# Altium PCB Copy of eos26_motherboard_basic.PcbDoc
Units mil, origin at the board's own origin, x right, y up, seen from the top; angles counter-clockwise.
Board outline 8000 x 6000 mil, 4 copper layers (Top Layer, MidLayer 1, MidLayer 2, Bottom Layer), stack 23.756 mil thick; 131 components, 110 nets, 656 pads, 6 vias.
Unrouted connection lines stored in the file: 269.
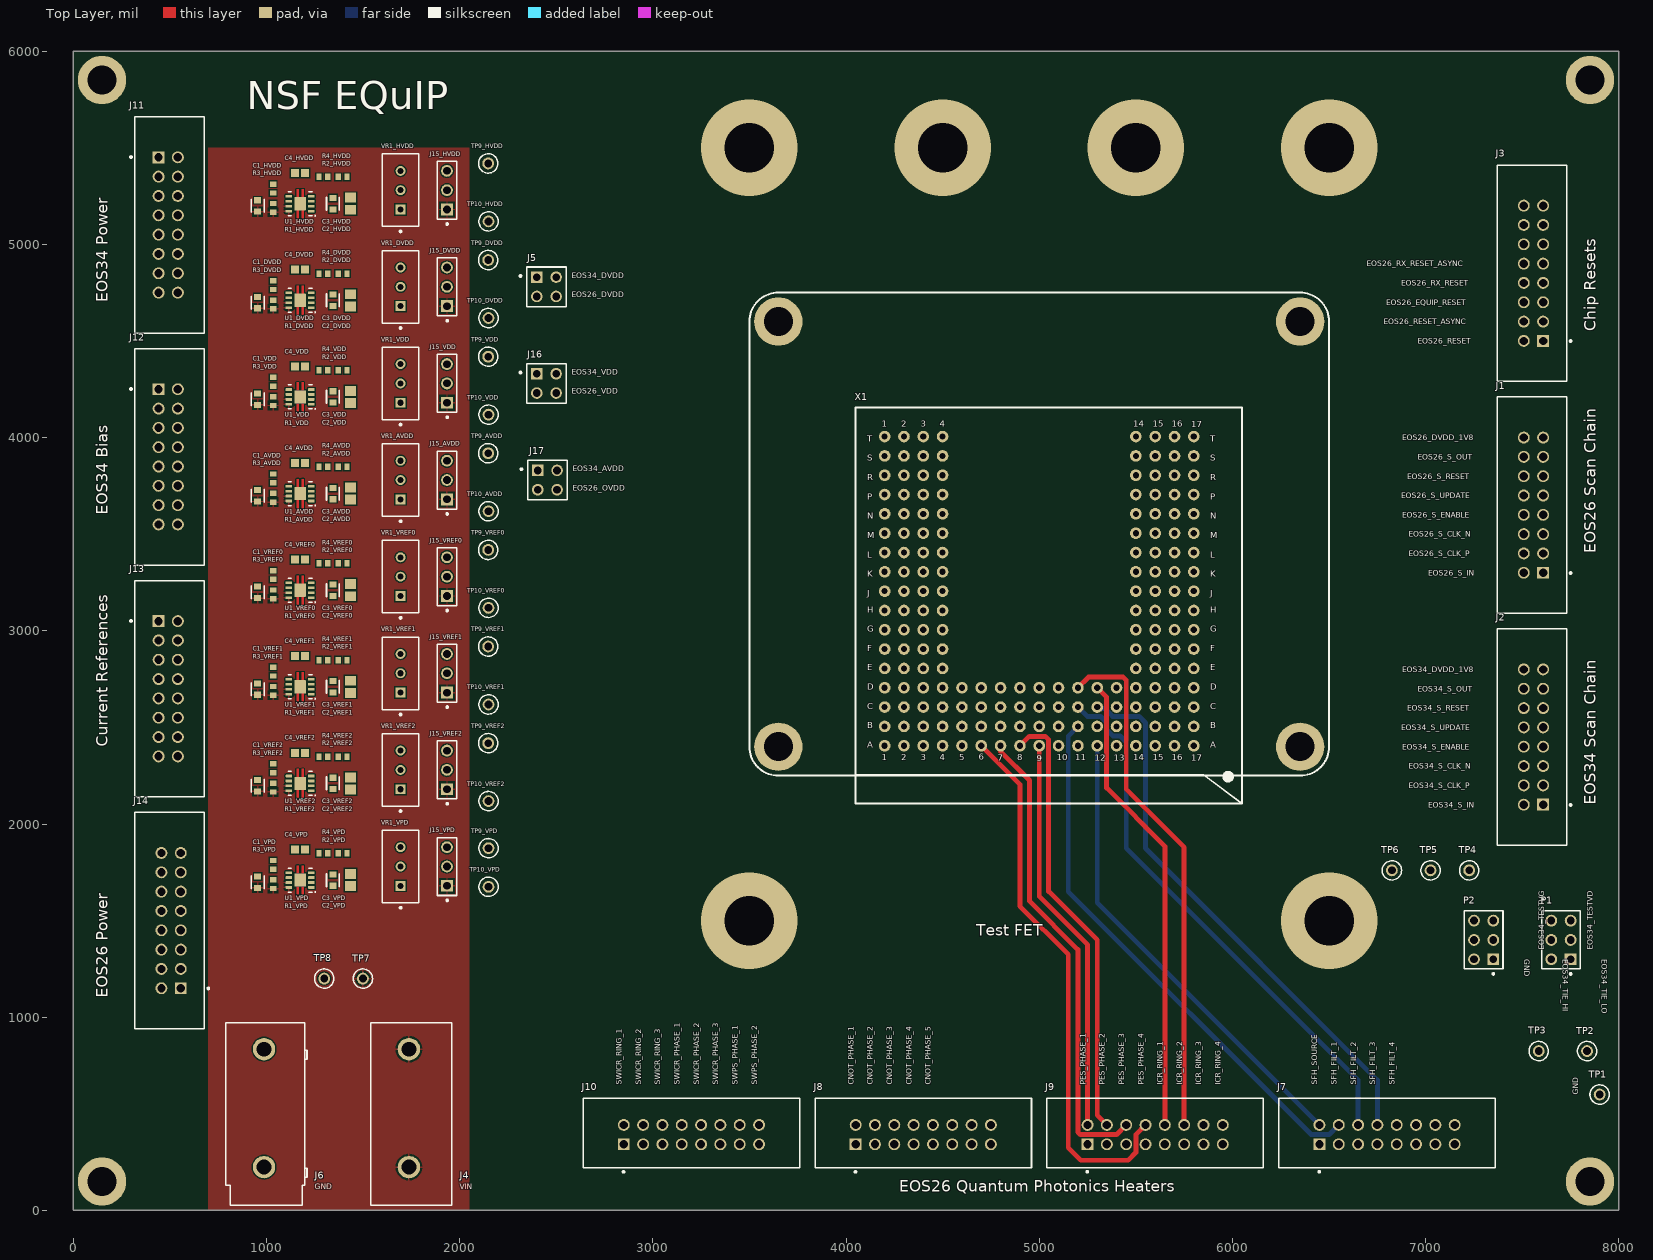
[diagram p0: Top Layer view]
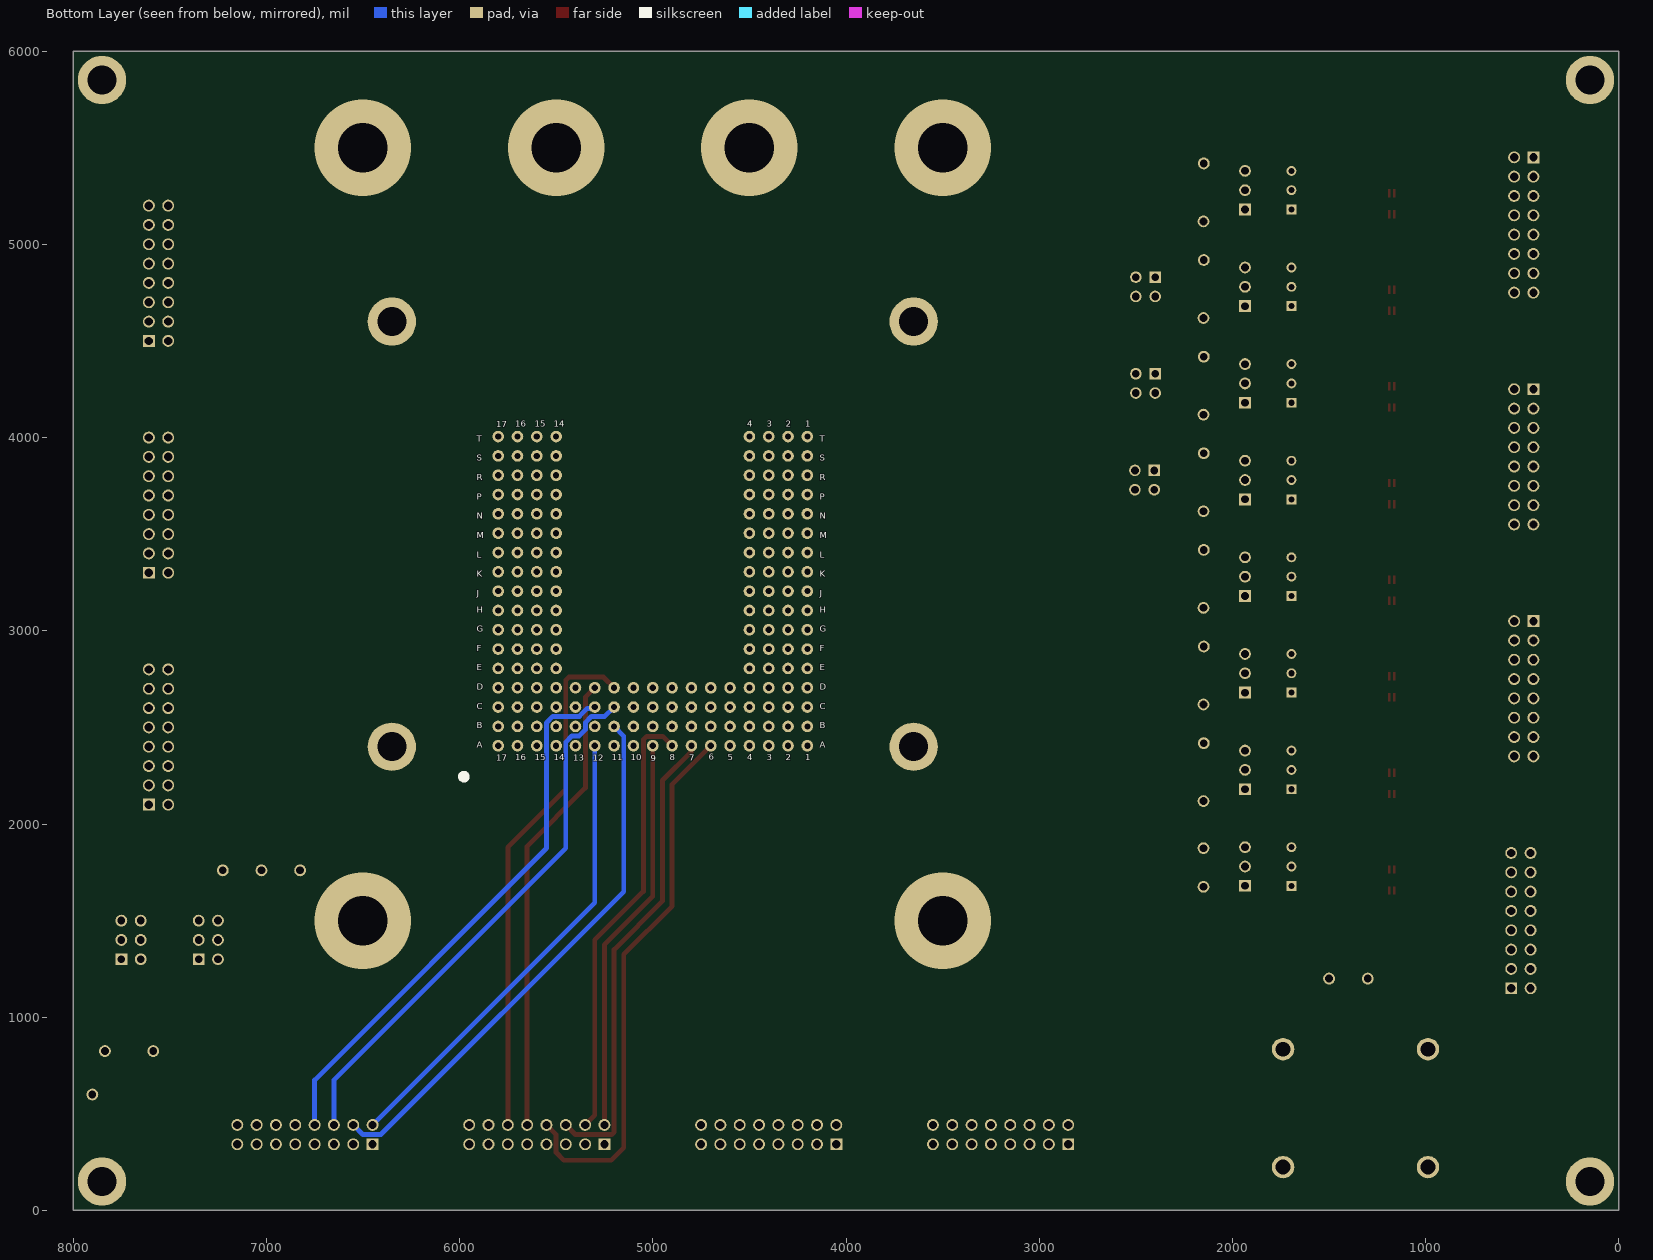
[diagram p1: Bottom Layer view, seen from below]
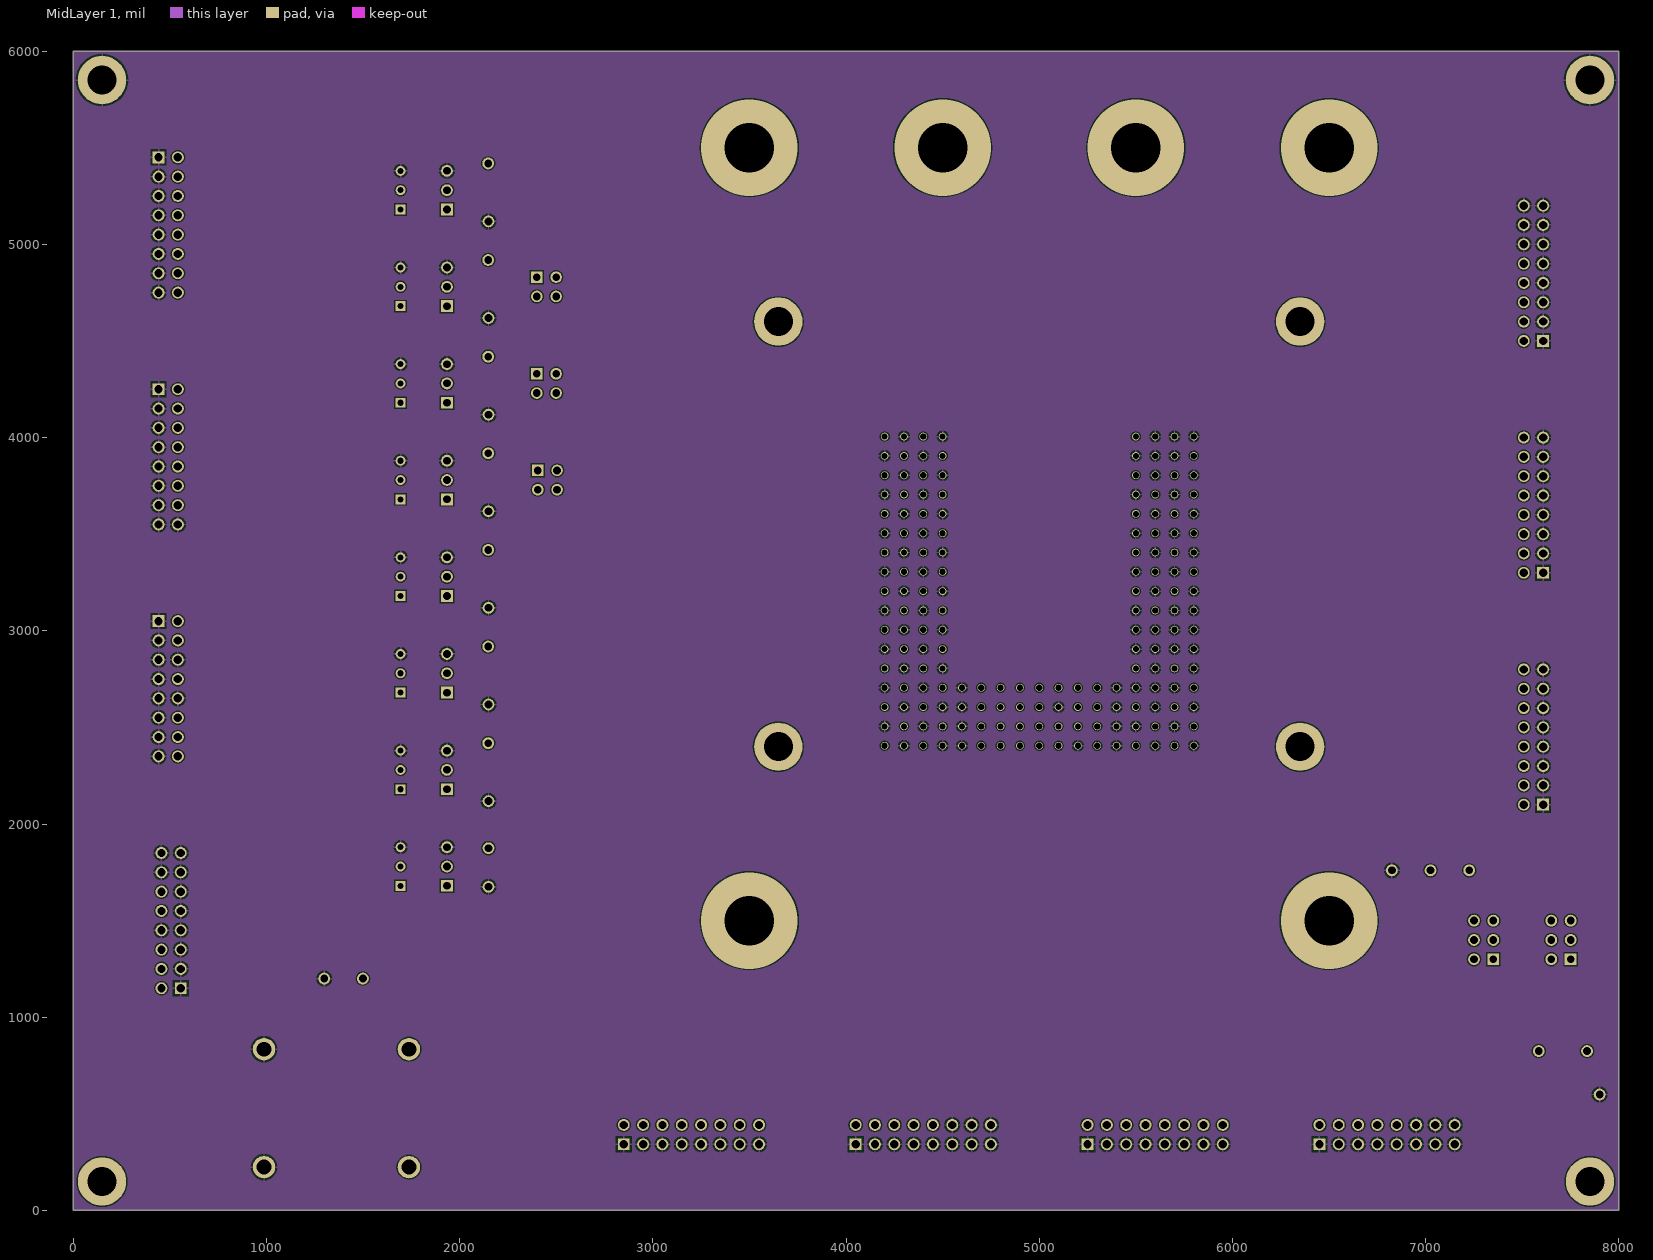
[diagram p2: MidLayer 1]

## Layer stack, top to bottom
Top Solder: solder mask 0.4, Solder Resist, Dk 3.5
Top Layer: signal copper 1.4
Dielectric 2: prepreg 2.8, PP-006, Dk 4.1
MidLayer 1: signal copper 1.3779
Dielectric 1: dielectric 12.6, FR-4, Dk 4.8
MidLayer 2: signal copper 1.3779
Dielectric 3: prepreg 2.8, PP-006, Dk 4.1
Bottom Layer: signal copper 1.4
Bottom Solder: solder mask 0.4, Solder Resist, Dk 3.5

## Board outline
0,0 0,6000 8000,6000 8000,0

## Design rules (kind name [scope] priority, off if disabled: settings)
Clearance [All] p1: gap=6 ignorepadtopadclearanceinfootprint=FALSE
PolygonConnect [All] p1: connectstyle=Relief reliefconductorwidth=10 reliefentries=4 polygonreliefangle="90 Angle" airgapwidth=10
RoomDefinition HVDD [InComponentClass('HVDD')] p1: confinementstyle=ConfineIn formatcopy=TRUE lockcomponents=FALSE outline 900,5050 2248.43,5050 2248.43,5518.5 900,5518.5
RoomDefinition DVDD [InComponentClass('DVDD')] p2: confinementstyle=ConfineIn formatcopy=TRUE lockcomponents=FALSE outline 900,4550 2248.43,4550 2248.43,5018.5 900,5018.5
RoomDefinition VREF2 [InComponentClass('VREF2')] p3: confinementstyle=ConfineIn formatcopy=TRUE lockcomponents=FALSE outline 900,2050 2248.43,2050 2248.43,2518.5 900,2518.5
RoomDefinition VREF1 [InComponentClass('VREF1')] p4: confinementstyle=ConfineIn formatcopy=TRUE lockcomponents=FALSE outline 900,2550 2248.43,2550 2248.43,3018.5 900,3018.5
RoomDefinition VREF0 [InComponentClass('VREF0')] p5: confinementstyle=ConfineIn formatcopy=TRUE lockcomponents=FALSE outline 900,3050 2248.43,3050 2248.43,3518.5 900,3518.5
RoomDefinition VPD [InComponentClass('VPD')] p6: confinementstyle=ConfineIn formatcopy=TRUE lockcomponents=FALSE outline 900,1550 2248.43,1550 2248.43,2025 900,2025
RoomDefinition VDD [InComponentClass('VDD')] p7: confinementstyle=ConfineIn formatcopy=TRUE lockcomponents=FALSE outline 900,4050 2248.43,4050 2248.43,4518.5 900,4518.5
RoomDefinition AVDD [InComponentClass('AVDD')] p8: confinementstyle=ConfineIn formatcopy=TRUE lockcomponents=FALSE outline 900,3550 2248.43,3550 2248.43,4018.5 900,4018.5
RoutingVias [All] p1: holewidth=28 width=50 viastyle="Through Hole" minholewidth=28 minwidth=50 maxholewidth=28 maxwidth=50
SolderMaskExpansion [All] p1: expansion=4
Width [All] p1: maxlimit=100 minlimit=8 preferedwidth=32
30 further rules are at their usual default settings.

## Classes and differential pairs
component class HVDD: C1_HVDD C2_HVDD C3_HVDD C4_HVDD J15_HVDD R1_HVDD R2_HVDD R3_HVDD R4_HVDD TP9_HVDD TP10_HVDD U1_HVDD VR1_HVDD
component class VREF2: C1_VREF2 C2_VREF2 C3_VREF2 C4_VREF2 J15_VREF2 R1_VREF2 R2_VREF2 R3_VREF2 R4_VREF2 TP9_VREF2 TP10_VREF2 U1_VREF2 VR1_VREF2
component class VREF1: C1_VREF1 C2_VREF1 C3_VREF1 C4_VREF1 J15_VREF1 R1_VREF1 R2_VREF1 R3_VREF1 R4_VREF1 TP9_VREF1 TP10_VREF1 U1_VREF1 VR1_VREF1
component class VREF0: C1_VREF0 C2_VREF0 C3_VREF0 C4_VREF0 J15_VREF0 R1_VREF0 R2_VREF0 R3_VREF0 R4_VREF0 TP9_VREF0 TP10_VREF0 U1_VREF0 VR1_VREF0
component class VPD: C1_VPD C2_VPD C3_VPD C4_VPD J15_VPD R1_VPD R2_VPD R3_VPD R4_VPD TP9_VPD TP10_VPD U1_VPD VR1_VPD
component class VDD: C1_VDD C2_VDD C3_VDD C4_VDD J15_VDD R1_VDD R2_VDD R3_VDD R4_VDD TP9_VDD TP10_VDD U1_VDD VR1_VDD
component class DVDD: C1_DVDD C2_DVDD C3_DVDD C4_DVDD J15_DVDD R1_DVDD R2_DVDD R3_DVDD R4_DVDD TP9_DVDD TP10_DVDD U1_DVDD VR1_DVDD
component class AVDD: C1_AVDD C2_AVDD C3_AVDD C4_AVDD J15_AVDD R1_AVDD R2_AVDD R3_AVDD R4_AVDD TP9_AVDD TP10_AVDD U1_AVDD VR1_AVDD
channel class subckt_adjustable_LDO: LDO6 LDO7
component class eos26_motherboard_basic: J1 J2 J3 J4 J5 J6 J7 J8 J9 J10 J11 J12 J13 J14 J16 J17 P1 P2 TP1 TP2 TP3 TP4 TP5 TP6 TP7 TP8 X1

## Components (designator, comment, footprint, x,y, rotation, side; value= is the part's Value field where it differs from the comment)
C1_AVDD "CAP CER 100nF 0603 X7R" FP-CC0603-DA-MFG 955,3698.5 r90 top value="100 nF" (schematic designator C1)
C1_DVDD "CAP CER 100nF 0603 X7R" FP-CC0603-DA-MFG 955,4698.5 r90 top value="100 nF" (schematic designator C1)
C1_HVDD "CAP CER 100nF 0603 X7R" FP-CC0603-DA-MFG 955,5198.5 r90 top value="100 nF" (schematic designator C1)
C1_VDD "CAP CER 100nF 0603 X7R" FP-CC0603-DA-MFG 955,4198.5 r90 top value="100 nF" (schematic designator C1)
C1_VPD "CAP CER 100nF 0603 X7R" FP-CC0603-DA-MFG 955,1698.5 r90 top value="100 nF" (schematic designator C1)
C1_VREF0 "CAP CER 100nF 0603 X7R" FP-CC0603-DA-MFG 955,3198.5 r90 top value="100 nF" (schematic designator C1)
C1_VREF1 "CAP CER 100nF 0603 X7R" FP-CC0603-DA-MFG 955,2698.5 r90 top value="100 nF" (schematic designator C1)
C1_VREF2 "CAP CER 100nF 0603 X7R" FP-CC0603-DA-MFG 955,2198.5 r90 top value="100 nF" (schematic designator C1)
C2_AVDD "CAP CER 4.7uF 0805 X7R" CAPC2013X140X50NL20T25 1435,3710 r90 top (schematic designator C2)
C2_DVDD "CAP CER 4.7uF 0805 X7R" CAPC2013X140X50NL20T25 1435,4710 r90 top (schematic designator C2)
C2_HVDD "CAP CER 4.7uF 0805 X7R" CAPC2013X140X50NL20T25 1435,5210 r90 top (schematic designator C2)
C2_VDD "CAP CER 4.7uF 0805 X7R" CAPC2013X140X50NL20T25 1435,4210 r90 top (schematic designator C2)
C2_VPD "CAP CER 4.7uF 0805 X7R" CAPC2013X140X50NL20T25 1435,1710 r90 top (schematic designator C2)
C2_VREF0 "CAP CER 4.7uF 0805 X7R" CAPC2013X140X50NL20T25 1435,3210 r90 top (schematic designator C2)
C2_VREF1 "CAP CER 4.7uF 0805 X7R" CAPC2013X140X50NL20T25 1435,2710 r90 top (schematic designator C2)
C2_VREF2 "CAP CER 4.7uF 0805 X7R" CAPC2013X140X50NL20T25 1435,2210 r90 top (schematic designator C2)
C3_AVDD "CAP CER 100nF 0603 X7R" FP-CC0603-DA-MFG 1345,3710 r90 top value="100 nF" (schematic designator C3)
C3_DVDD "CAP CER 100nF 0603 X7R" FP-CC0603-DA-MFG 1345,4710 r90 top value="100 nF" (schematic designator C3)
C3_HVDD "CAP CER 100nF 0603 X7R" FP-CC0603-DA-MFG 1345,5210 r90 top value="100 nF" (schematic designator C3)
C3_VDD "CAP CER 100nF 0603 X7R" FP-CC0603-DA-MFG 1345,4210 r90 top value="100 nF" (schematic designator C3)
C3_VPD "CAP CER 100nF 0603 X7R" FP-CC0603-DA-MFG 1345,1710 r90 top value="100 nF" (schematic designator C3)
C3_VREF0 "CAP CER 100nF 0603 X7R" FP-CC0603-DA-MFG 1345,3210 r90 top value="100 nF" (schematic designator C3)
C3_VREF1 "CAP CER 100nF 0603 X7R" FP-CC0603-DA-MFG 1345,2710 r90 top value="100 nF" (schematic designator C3)
C3_VREF2 "CAP CER 100nF 0603 X7R" FP-CC0603-DA-MFG 1345,2210 r90 top value="100 nF" (schematic designator C3)
C4_AVDD "CAP CER 10nF 0603 X7R" CAPC1608X90X40ML10T20 1175,3868.5 r0 top (schematic designator C4)
C4_DVDD "CAP CER 10nF 0603 X7R" CAPC1608X90X40ML10T20 1175,4868.5 r0 top (schematic designator C4)
C4_HVDD "CAP CER 10nF 0603 X7R" CAPC1608X90X40ML10T20 1175,5368.5 r0 top (schematic designator C4)
C4_VDD "CAP CER 10nF 0603 X7R" CAPC1608X90X40ML10T20 1175,4368.5 r0 top (schematic designator C4)
C4_VPD "CAP CER 10nF 0603 X7R" CAPC1608X90X40ML10T20 1175,1868.5 r0 top (schematic designator C4)
C4_VREF0 "CAP CER 10nF 0603 X7R" CAPC1608X90X40ML10T20 1175,3368.5 r0 top (schematic designator C4)
C4_VREF1 "CAP CER 10nF 0603 X7R" CAPC1608X90X40ML10T20 1175,2868.5 r0 top (schematic designator C4)
C4_VREF2 "CAP CER 10nF 0603 X7R" CAPC1608X90X40ML10T20 1175,2368.5 r0 top (schematic designator C4)
J1 "30316-6002HB" FP-30316-6002HB-MFG 7550,3650 r90 top
J2 "30316-6002HB" FP-30316-6002HB-MFG 7550,2450 r90 top
J3 "30316-6002HB" FP-30316-6002HB-MFG 7550,4850 r90 top
J4 "24.243.1" FP-24_243_1-MFG 1750,500 r270 top
J5 "HTSW-102-07-G-D" FP-HTSW-102-07-G-D-MFG 2450,4780 r270 top
J6 "24.243.2" FP-24_243_2-MFG 1000,500 r90 top
J7 "30316-6002HB" FP-30316-6002HB-MFG 6800,400 r0 top
J8 "30316-6002HB" FP-30316-6002HB-MFG 4400,400 r0 top
J9 "30316-6002HB" FP-30316-6002HB-MFG 5600,400 r0 top
J10 "30316-6002HB" FP-30316-6002HB-MFG 3200,400 r0 top
J11 "30316-6002HB" FP-30316-6002HB-MFG 500,5100 r270 top
J12 "30316-6002HB" FP-30316-6002HB-MFG 500,3900 r270 top
J13 "30316-6002HB" FP-30316-6002HB-MFG 500,2700 r270 top
J14 "30316-6002HB" FP-30316-6002HB-MFG 500,1500 r90 top
J15_AVDD "90120-0763" FP-90120-0763-MFG 1935,3780 r90 top (schematic designator J15)
J15_DVDD "90120-0763" FP-90120-0763-MFG 1935,4780 r90 top (schematic designator J15)
J15_HVDD "90120-0763" FP-90120-0763-MFG 1935,5280 r90 top (schematic designator J15)
J15_VDD "90120-0763" FP-90120-0763-MFG 1935,4280 r90 top (schematic designator J15)
J15_VPD "90120-0763" FP-90120-0763-MFG 1935,1780 r90 top (schematic designator J15)
J15_VREF0 "90120-0763" FP-90120-0763-MFG 1935,3280 r90 top (schematic designator J15)
J15_VREF1 "90120-0763" FP-90120-0763-MFG 1935,2780 r90 top (schematic designator J15)
J15_VREF2 "90120-0763" FP-90120-0763-MFG 1935,2280 r90 top (schematic designator J15)
J16 "HTSW-102-07-G-D" FP-HTSW-102-07-G-D-MFG 2450,4280 r270 top
J17 "HTSW-102-07-G-D" FP-HTSW-102-07-G-D-MFG 2455,3780 r270 top
P1 "TSW-103-07-G-D" SMTC-TSW-103-07-G-D_V 7700,1400 r90 top
P2 "TSW-103-07-G-D" SMTC-TSW-103-07-G-D_V 7300,1400 r90 top
R1_AVDD "DNP" RESC1609X50X30LL10T20 1035,3688.5 r270 top (schematic designator R1)
R1_DVDD "DNP" RESC1609X50X30LL10T20 1035,4688.5 r270 top (schematic designator R1)
R1_HVDD "DNP" RESC1609X50X30LL10T20 1035,5188.5 r270 top (schematic designator R1)
R1_VDD "DNP" RESC1609X50X30LL10T20 1035,4188.5 r270 top (schematic designator R1)
R1_VPD "DNP" RESC1609X50X30LL10T20 1035,1688.5 r270 top (schematic designator R1)
R1_VREF0 "DNP" RESC1609X50X30LL10T20 1035,3188.5 r270 top (schematic designator R1)
R1_VREF1 "DNP" RESC1609X50X30LL10T20 1035,2688.5 r270 top (schematic designator R1)
R1_VREF2 "DNP" RESC1609X50X30LL10T20 1035,2188.5 r270 top (schematic designator R1)
R2_AVDD "DNP" RESC1609X50X30LL10T20 1395,3848.5 r0 top (schematic designator R2)
R2_DVDD "DNP" RESC1609X50X30LL10T20 1395,4848.5 r0 top (schematic designator R2)
R2_HVDD "DNP" RESC1609X50X30LL10T20 1395,5348.5 r0 top (schematic designator R2)
R2_VDD "DNP" RESC1609X50X30LL10T20 1395,4348.5 r0 top (schematic designator R2)
R2_VPD "DNP" RESC1609X50X30LL10T20 1395,1848.5 r0 top (schematic designator R2)
R2_VREF0 "DNP" RESC1609X50X30LL10T20 1395,3348.5 r0 top (schematic designator R2)
R2_VREF1 "DNP" RESC1609X50X30LL10T20 1395,2848.5 r0 top (schematic designator R2)
R2_VREF2 "DNP" RESC1609X50X30LL10T20 1395,2348.5 r0 top (schematic designator R2)
R3_AVDD "DNP" RESC1609X50X30LL10T20 1035,3788.5 r270 top (schematic designator R3)
R3_DVDD "DNP" RESC1609X50X30LL10T20 1035,4788.5 r270 top (schematic designator R3)
R3_HVDD "DNP" RESC1609X50X30LL10T20 1035,5288.5 r270 top (schematic designator R3)
R3_VDD "DNP" RESC1609X50X30LL10T20 1035,4288.5 r270 top (schematic designator R3)
R3_VPD "DNP" RESC1609X50X30LL10T20 1035,1788.5 r270 top (schematic designator R3)
R3_VREF0 "DNP" RESC1609X50X30LL10T20 1035,3288.5 r270 top (schematic designator R3)
R3_VREF1 "DNP" RESC1609X50X30LL10T20 1035,2788.5 r270 top (schematic designator R3)
R3_VREF2 "DNP" RESC1609X50X30LL10T20 1035,2288.5 r270 top (schematic designator R3)
R4_AVDD "DNP" RESC1609X50X30LL10T20 1295,3848.5 r0 top (schematic designator R4)
R4_DVDD "DNP" RESC1609X50X30LL10T20 1295,4848.5 r0 top (schematic designator R4)
R4_HVDD "DNP" RESC1609X50X30LL10T20 1295,5348.5 r0 top (schematic designator R4)
R4_VDD "DNP" RESC1609X50X30LL10T20 1295,4348.5 r0 top (schematic designator R4)
R4_VPD "DNP" RESC1609X50X30LL10T20 1295,1848.5 r0 top (schematic designator R4)
R4_VREF0 "DNP" RESC1609X50X30LL10T20 1295,3348.5 r0 top (schematic designator R4)
R4_VREF1 "DNP" RESC1609X50X30LL10T20 1295,2848.5 r0 top (schematic designator R4)
R4_VREF2 "DNP" RESC1609X50X30LL10T20 1295,2348.5 r0 top (schematic designator R4)
TP1 "5001" KSTN-5001 7900,600 r0 top
TP2 "5002" KSTN-5002 7835,825 r0 top
TP3 "5002" KSTN-5002 7585,825 r0 top
TP4 "5002" KSTN-5002 7225,1760 r0 top
TP5 "5002" KSTN-5002 7025,1760 r0 top
TP6 "5001" KSTN-5001 6825,1760 r0 top
TP7 "5002" KSTN-5002 1500,1200 r0 top
TP8 "5001" KSTN-5001 1300,1200 r0 top
TP9_AVDD "5002" KSTN-5002 2148.43,3918.5 r90 top (schematic designator TP9)
TP9_DVDD "5002" KSTN-5002 2148.43,4918.5 r90 top (schematic designator TP9)
TP9_HVDD "5002" KSTN-5002 2148.43,5418.5 r90 top (schematic designator TP9)
TP9_VDD "5002" KSTN-5002 2148.43,4418.5 r90 top (schematic designator TP9)
TP9_VPD "5002" KSTN-5002 2150,1875 r90 top (schematic designator TP9)
TP9_VREF0 "5002" KSTN-5002 2148.43,3418.5 r90 top (schematic designator TP9)
TP9_VREF1 "5002" KSTN-5002 2148.43,2918.5 r90 top (schematic designator TP9)
TP9_VREF2 "5002" KSTN-5002 2148.43,2418.5 r90 top (schematic designator TP9)
TP10_AVDD "5001" KSTN-5001 2150,3618.5 r90 top (schematic designator TP10)
TP10_DVDD "5001" KSTN-5001 2150,4618.5 r90 top (schematic designator TP10)
TP10_HVDD "5001" KSTN-5001 2150,5118.5 r90 top (schematic designator TP10)
TP10_VDD "5001" KSTN-5001 2150,4118.5 r90 top (schematic designator TP10)
TP10_VPD "5001" KSTN-5001 2150,1675 r90 top (schematic designator TP10)
TP10_VREF0 "5001" KSTN-5001 2150,3118.5 r90 top (schematic designator TP10)
TP10_VREF1 "5001" KSTN-5001 2150,2618.5 r90 top (schematic designator TP10)
TP10_VREF2 "5001" KSTN-5001 2150,2118.5 r90 top (schematic designator TP10)
U1_AVDD "TPS7A8001DRBT" DRB0008A_V 1175,3710 r180 top (schematic designator U1)
U1_DVDD "TPS7A8001DRBT" DRB0008A_V 1175,4710 r180 top (schematic designator U1)
U1_HVDD "TPS7A8001DRBT" DRB0008A_V 1175,5210 r180 top (schematic designator U1)
U1_VDD "TPS7A8001DRBT" DRB0008A_V 1175,4210 r180 top (schematic designator U1)
U1_VPD "TPS7A8001DRBT" DRB0008A_V 1175,1710 r180 top (schematic designator U1)
U1_VREF0 "TPS7A8001DRBT" DRB0008A_V 1175,3210 r180 top (schematic designator U1)
U1_VREF1 "TPS7A8001DRBT" DRB0008A_V 1175,2710 r180 top (schematic designator U1)
U1_VREF2 "TPS7A8001DRBT" DRB0008A_V 1175,2210 r180 top (schematic designator U1)
VR1_AVDD "3296W-1-103LF" BOUR-3296W 1695,3780 r90 top (schematic designator VR1)
VR1_DVDD "3296W-1-103LF" BOUR-3296W 1695,4780 r90 top (schematic designator VR1)
VR1_HVDD "3296W-1-103LF" BOUR-3296W 1695,5280 r90 top (schematic designator VR1)
VR1_VDD "3296W-1-103LF" BOUR-3296W 1695,4280 r90 top (schematic designator VR1)
VR1_VPD "3296W-1-103LF" BOUR-3296W 1695,1780 r90 top (schematic designator VR1)
VR1_VREF0 "3296W-1-103LF" BOUR-3296W 1695,3280 r90 top (schematic designator VR1)
VR1_VREF1 "3296W-1-103LF" BOUR-3296W 1695,2780 r90 top (schematic designator VR1)
VR1_VREF2 "3296W-1-103LF" BOUR-3296W 1695,2280 r90 top (schematic designator VR1)
X1 "pga_socket_208_highspeed_cutout" pga_socket_208pin_highspeed_cutout 5000,3205 r0 top

## Footprints (in the part's own frame and the unit in brackets; to place one, negate y for a bottom-side part, rotate by r counter-clockwise, add the part's x,y. Pads: shape width x height; smd on the part's side, far side on the other; paste and mask are expansions set on the pad)
BOUR-3296W [mm] "THD, 3-Leads, Body 9.53x4.83mm, Pitch 2.54mm"
  rect 1.3x1.3 hole 0.8: 1(-2.54,0)
  round 1.3 hole 0.8: 2(0,0) 3(2.54,0)
  silkscreen extent -5.54,-2.41 4.76,2.42, body extent -4.76,-2.4 4.76,2.42, height 11.55
CAPC1608X90X40ML10T20 [mm] "Chip Capacitor, 2-Leads, Body 1.7x0.9mm, IPC Low Density"
  rect 1.05x1.05 smd: 1(-0.675,0) 2(0.675,0)
  body extent -0.85,-0.45 0.85,0.45, height 0.9
CAPC2013X140X50NL20T25 [mm] "Chip Capacitor, 2-Leads, Body 2.00x1.25mm, IPC Medium Density"
  rect 1.3x1.45 smd: 1(-0.8,0) 2(0.8,0)
  body extent -1.1,-0.72 1.1,0.72, height 1.4
DRB0008A_V [mm] "SON, 8-Leads, Body 3x3mm, Pitch 0.65mm, Thermal Pad 1.50 x 3.8mm"
  rrect29% 0.85x0.35 smd: 1(-1.475,0.975) 2(-1.475,0.325) 3(-1.475,-0.325) 4(-1.475,-0.975) 5(1.475,-0.975) 6(1.475,-0.325) 7(1.475,0.325) 8(1.475,0.975)
  rrect7% 1.5x1.75 smd: 9(0,0)
  Top Layer region: 0.185,0.875 0.185,1.9 0.465,1.9 0.465,0.875
  Top Layer region: -0.185,-0.875 -0.185,-1.9 -0.465,-1.9 -0.465,-0.875
  Top Layer region: 0.185,-0.875 0.185,-1.9 0.465,-1.9 0.465,-0.875
  Top Layer region: -0.185,0.875 -0.185,1.9 -0.465,1.9 -0.465,0.875
  silkscreen extent -2.02,-1.58 1.57,1.62, body extent -1.5,-1.5 1.5,1.5, height 1
FP-24_243_1-MFG [mm]
  round 2.95 hole 1.95 paste-1000 mask+0: 1(-8.5,-0.3) 1(7,-0.3)
  silkscreen extent -12,-5.35 12,5.35, body extent -12.1,-5.45 12.1,5.45, height 0.25
FP-24_243_2-MFG [mm]
  round 2.95 hole 1.95 paste-1000 mask+0: 1(-7,0.3) 1(8.5,0.3)
  silkscreen extent -12,-5.35 12,5.35, body extent -12.1,-5.45 12.1,5.45, height 0.25
FP-30316-6002HB-MFG [mil]
  rect 61.65x61.65 hole 43 paste-39370.1 mask+0: 1(-350,-57.5)
  round 61.65 hole 43 paste-39370.1 mask+0: 2(-350,42.5) 3(-250,-57.5) 4(-250,42.5) 5(-150,-57.5) 6(-150,42.5) 7(-50,-57.5) 8(-50,42.5) 9(50,-57.5) 10(50,42.5) 11(150,-57.5) 12(150,42.5) 13(250,-57.5) 14(250,42.5) 15(350,-57.5) 16(350,42.5)
  silkscreen extent -560,-205 560,180, body extent -564,-184 564,184, height 10
FP-90120-0763-MFG [mm]
  rect 1.55x1.55 hole 1 paste-1000 mask+0: 1(-2.54,0)
  round 1.55 hole 1 paste-1000 mask+0: 2(0,0) 3(2.54,0)
  silkscreen extent -4.57,-1.27 3.81,1.27, body extent -3.91,-1.37 3.91,1.37, height 0.25
FP-CC0603-DA-MFG [mm]
  rect 0.8x0.9 smd paste+0 mask+0: 1(-0.75,0) 2(0.75,0)
  silkscreen extent -0.85,-0.85 0.85,0.85, body extent -1.35,-0.75 1.35,0.75, height 0.25
FP-HTSW-102-07-G-D-MFG [mm]
  rect 1.52x1.52 hole 1.02 paste-1000 mask+0: 1(-1.27,-1.27)
  round 1.52 hole 1.02 paste-1000 mask+0: 2(-1.27,1.27) 3(1.27,-1.27) 4(1.27,1.27)
  silkscreen extent -2.6,-3.54 2.6,2.58, body extent -2.7,-2.68 2.7,2.68, height 0.25
KSTN-5001 [mm] "Test Point, Through Hole, Dia 2.54mm"
  round 1.55 hole 1.016: 1(0,0)
  silkscreen extent -1.27,-1.27 1.27,1.27, body extent -1.25,-1.25 1.25,1.25, height 4.62
KSTN-5002 [mm] "Test Point, Through Hole, Dia 2.54mm"
  round 1.55 hole 1.016: 1(0,0)
  silkscreen extent -1.27,-1.27 1.27,1.27, body extent -1.25,-1.25 1.25,1.25, height 4.62
pga_socket_208pin_highspeed_cutout [mil]
  round 60 / inner round 40 / far side round 60 hole 32 mask+0: A1(-800,-800) A2(-700,-800) A3(-600,-800) A4(-500,-800) A5(-400,-800) A6(-300,-800) A7(-200,-800) A8(-100,-800) A9(0,-800) A10(100,-800) A11(200,-800) A12(300,-800) A13(400,-800) A14(500,-800) A15(600,-800) A16(700,-800) A17(800,-800) B1(-800,-700) B2(-700,-700) B3(-600,-700) B4(-500,-700) B5(-400,-700) B6(-300,-700) B7(-200,-700) B8(-100,-700) B9(0,-700) B10(100,-700) B11(200,-700) B12(300,-700) B13(400,-700) B14(500,-700) B15(600,-700) B16(700,-700) B17(800,-700) C1(-800,-600) C2(-700,-600) C3(-600,-600) C4(-500,-600) C5(-400,-600) C6(-300,-600) C7(-200,-600) C8(-100,-600) C9(0,-600) C10(100,-600) C11(200,-600) C12(300,-600) C13(400,-600) C14(500,-600) C15(600,-600) C16(700,-600) C17(800,-600) D1(-800,-500) D2(-700,-500) D3(-600,-500) D4(-500,-500) D5(-400,-500) D6(-300,-500) D7(-200,-500) D8(-100,-500) D9(0,-500) D10(100,-500) D11(200,-500) D12(300,-500) D13(400,-500) D14(500,-500) D15(600,-500) D16(700,-500) D17(800,-500) E1(-800,-400) E2(-700,-400) E3(-600,-400) E4(-500,-400) E14(500,-400) E15(600,-400) E16(700,-400) E17(800,-400) F1(-800,-300) F2(-700,-300) F3(-600,-300) F4(-500,-300) F14(500,-300) F15(600,-300) F16(700,-300) F17(800,-300) G1(-800,-200) G2(-700,-200) G3(-600,-200) G4(-500,-200) G14(500,-200) G15(600,-200) G16(700,-200) G17(800,-200) H1(-800,-100) H2(-700,-100) H3(-600,-100) H4(-500,-100) H14(500,-100) H15(600,-100) H16(700,-100) H17(800,-100) J1(-800,0) J2(-700,0) J3(-600,0) J4(-500,0) J14(500,0) J15(600,0) J16(700,0) J17(800,0) K1(-800,100) K2(-700,100) K3(-600,100) K4(-500,100) K14(500,100) K15(600,100) K16(700,100) K17(800,100) L1(-800,200) L2(-700,200) L3(-600,200) L4(-500,200) L14(500,200) L15(600,200) L16(700,200) L17(800,200) M1(-800,300) M2(-700,300) M3(-600,300) M4(-500,300) M14(500,300) M15(600,300) M16(700,300) M17(800,300) N1(-800,400) N2(-700,400) N3(-600,400) N4(-500,400) N14(500,400) N15(600,400) N16(700,400) N17(800,400) P1(-800,500) P2(-700,500) P3(-600,500) P4(-500,500) P14(500,500) P15(600,500) P16(700,500) P17(800,500) R1(-800,600) R2(-700,600) R3(-600,600) R4(-500,600) R14(500,600) R15(600,600) R16(700,600) R17(800,600) S1(-800,700) S2(-700,700) S3(-600,700) S4(-500,700) S14(500,700) S15(600,700) S16(700,700) S17(800,700) T1(-800,800) T2(-700,800) T3(-600,800) T4(-500,800) T14(500,800) T15(600,800) T16(700,800) T17(800,800)
  silkscreen extent -950,-1100 1050,950
RESC1609X50X30LL10T20 [mm] "Chip Resistor, 2-Leads, Body 1.55x0.85mm, IPC High Density"
  rect 0.7x0.85 smd: 1(-0.575,0) 2(0.575,0)
  body extent -0.82,-0.48 0.82,0.48, height 0.5
SMTC-TSW-103-07-G-D_V [mm] "THD, 6-Leads, Body 7.62x5.08mm, Pitch 2.54mm"
  rect 1.55x1.55 hole 1.02: 1(-2.54,-1.27)
  round 1.55 hole 1.02: 2(-2.54,1.27) 3(0,-1.27) 4(0,1.27) 5(2.54,-1.27) 6(2.54,1.27)
  silkscreen extent -4.58,-2.54 3.81,2.54, body extent -3.81,-2.54 3.81,2.54, height 8.38

## Part data
C1_AVDD C1_DVDD C1_HVDD C1_VDD C1_VPD C1_VREF0 C1_VREF1 C1_VREF2 C3_AVDD C3_DVDD C3_HVDD C3_VDD C3_VPD C3_VREF0 C3_VREF1 C3_VREF2: library part CMP-03422-000030-1, "CAP CER 0.1UF 16V X7R 0603", Capacitance="100 nF", Manufacturer=YAGEO, Manufacturer Part Number=CC0603KRX7R7BB104, Package=CC0603-DA, Temperature="-55°C to +125°C", Temperature Characteristic=X7R, Temperature Coefficient=15%, Temperature Range High=+125°C, Temperature Range Low=-55°C, Tolerance=0.1, Voltage="16 V", Automotive=No, Category=Cap, ComponentLink2Description=Datasheet, ComponentLink2URL=http://www.yageo.com/documents/recent/UPY-GPHC_X7R_6.3V-to-50V_18.pdf, Device Class L1="Passive Components", Device Class L2=Capacitors, Device Class L3="Ceramic Capacitors", Digikey Description="CAP CER 0.1UF 16V X7R 0603", Footprint Url=http://www.yageo.com/exep/pages/download/literatures/UPY-C_GEN_24.pdf, Height=0.9mm, Lead Free=Yes, Material=Ceramic, Mouser Description="Multilayer Ceramic Capacitor, CC Series, 0.1 - F, - 10%, X7R, 16 V, 0603 [1608 Metric]", Octopart=https://octopart.com/cc0603krx7r7bb104-yageo-192941, RoHS=TRUE, Voltage Rating="16 V"
C2_AVDD C2_DVDD C2_HVDD C2_VDD C2_VPD C2_VREF0 C2_VREF1 C2_VREF2: library part CMP-2007-04677-1, Manufacturer="AVX Interconnect / Elco", Part Number=0805ZC475KAT2A
C4_AVDD C4_DVDD C4_HVDD C4_VDD C4_VPD C4_VREF0 C4_VREF1 C4_VREF2: library part CMP-2100-03600-1, "Chip Capacitor, 10 nF, +/- 10%, 50 V, -55 to 125 degC, 0603 (1608 Metric), RoHS, Tape and Reel", Capacitance=10nF, Case/Package=0603, Case Code (Metric)=1608, Dielectric=X7R, Insulation Resistance=100GR, Manufacturer=Yageo, Max Operating Temperature=125degC, Min Operating Temperature=-55degC, Package Description="2-Pin Surface Mount Device, Body 1.6 x 0.8 mm", Package Quantity=1, Tolerance=10%, Voltage=50V, Case Code (Imperial)=0603, Composition=Ceramic, Datasheet URL=http://www.yageo.com/documents/recent/UPY-GPHC_X7R_6.3V-to-50V_15.pdf, Datasheet Version="Rev. 15, 10/2016", Depth=0.8mm, Height=0.8mm, Lead Free=LeadFree, Length=1.6mm, Manufacturer URL=http://www.yageo.com/, Material=Ceramic, Mount=SurfaceMount, Number of Pins=2, Package Reference=0603, Packaging=TapeandReel, Radiation Hardening=No, REACH SVHC=NoSVHC, RoHSCompliant=True, Termination=SMD/SMT, Thickness=0.035inch, Voltage Rating=50V, Voltage Rating (DC)=50V, Width=0.031inch
J1 J2 J3 J7 J8 J9 J10 J11 J12 J13 J14: library part CMP-05379-000007-1, "CONN HEADER VERT 16POS 2.54MM", Current Rating=1A, Manufacturer=3M, Temperature="-55°C to +105°C", Temperature Range High=+105°C, Temperature Range Low=-55°C, Automotive=No, Category=Conn, ComponentLink2Description=Datasheet, ComponentLink2URL=https://multimedia.3m.com/mws/media/22504O/3mtm-100-in-loprof-hdr-100x-100strt-ra-4-wall-ts0818.pdf, Conn Gender=Male, Conn Orientation=Straight, Contact Material=Gold,Nickel, Device Class L1=Connectors, Device Class L2="Headers and Wire Housings", Device Class L3=unset, Digikey Description="CONN HEADER VERT 16POS 2.54MM", Height=0.375inch, Lead Free=Yes, Manufacturer Part Number=30316-6002HB, Mouser Description="Conn Shrouded Header (4 Sides) HDR 16 POS 2.54mm Solder ST Thru-Hole Box", Number Of Contacts=16, Number Of Rows=2, Octopart=https://octopart.com/30316-6002hb-3m-653367, Package=30316-6002HB, Pitch=2.54mm, RoHS=TRUE, Standoff Height=0.01inch
J4: library part CMP-12400-000001-1, "RECEPTACLE, 20A, 4MM, PCB, SOLDER, RED", Current Rating=24A, Manufacturer=Multicomp, Voltage Rating=60V, Automotive=No, Category=Conn, ComponentLink2Description=Datasheet, ComponentLink2URL=https://datasheet.octopart.com/24.243.1-Multicomp-datasheet-38887736.pdf, Conn Orientation=Horizontal, Contact Material=Silver, Device Class L1=Connectors, Device Class L2=unset, Device Class L3=unset, Height=13mm, Is Female=yes, Lead Free=Yes, Manufacturer Part Number=24.243.1, Number Of Contacts=1, Octopart=https://octopart.com/24.243.1-multicomp-57101049, Package=24.243.1, RoHS=TRUE
J5 J16 J17: library part CMP-02766-000010-1, "CONN HEADER VERT 4POS 2.54MM", Current Rating=6.3A, Manufacturer=Samtec, Temperature="-55°C to +125°C", Temperature Range High=+125°C, Temperature Range Low=-55°C, Voltage Rating=550V, Automotive=No, Category=Conn, ComponentLink2Description=Datasheet, ComponentLink2URL=http://suddendocs.samtec.com/catalog_english/htsw_th.pdf, Conn Gender=Male, Conn Orientation=Straight, Contact Material=Gold,Nickel, Device Class L1=Connectors, Device Class L2="Headers and Wire Housings", Device Class L3=unset, Digikey Description="CONN HEADER VERT 4POS 2.54MM", Height=8.71mm, Lead Free=Yes, Manufacturer Part Number=HTSW-102-07-G-D, Mouser Description="Conn Unshrouded Header HDR 4 POS 2.54mm Solder ST Thru-Hole Bag", Number Of Contacts=4, Number Of Rows=2, Octopart=https://octopart.com/htsw-102-07-g-d-samtec-10531767, Package=HTSW-102-07-G-D, Pitch=2.54mm, RoHS=TRUE
J6: library part CMP-12400-000002-1, "RECEPTACLE, 20A, 4MM, PCB, SOLDER, BLACK", Current Rating=24A, Manufacturer=Multicomp, Voltage Rating=60V, Automotive=No, Category=Conn, ComponentLink2Description=Datasheet, ComponentLink2URL=https://datasheet.octopart.com/24.243.2-Multicomp-datasheet-38887736.pdf, Conn Orientation=Horizontal, Contact Material=Silver, Device Class L1=Connectors, Device Class L2=unset, Device Class L3=unset, Height=13mm, Is Female=yes, Lead Free=Yes, Manufacturer Part Number=24.243.2, Number Of Contacts=1, Octopart=https://octopart.com/24.243.2-multicomp-57101050, Package=24.243.2, RoHS=TRUE
J15_AVDD J15_DVDD J15_HVDD J15_VDD J15_VPD J15_VREF0 J15_VREF1 J15_VREF2: library part CMP-04776-000084-1, "CONN HEADER VERT 3POS 2.54MM", Current Rating=3A, Manufacturer=Molex, Temperature="-55°C to +125°C", Temperature Range High=+125°C, Temperature Range Low=-55°C, Voltage Rating=350V, Automotive=No, Category=Conn, ComponentLink2Description=Datasheet, ComponentLink2URL=https://www.molex.com/webdocs/datasheets/pdf/en-us/0901200763_PCB_HEADERS.pdf, Conn Gender=Male, Conn Orientation=Vertical, Contact Material=Gold,Nickel, Device Class L1=Connectors, Device Class L2="Headers and Wire Housings", Device Class L3=unset, Digikey Description="CONN HEADER VERT 3POS 2.54MM", Footprint Url=https://www.molex.com/pdm_docs/sd/901200763_sd.pdf, Height=5.8mm, Lead Free=Yes, Manufacturer Part Number=90120-0763, Mouser Description="Board-To-Board Connector, C-Grid III 90120 Series, Through Hole, Header, 3, 2.54 mm", Number Of Contacts=3, Number Of Rows=1, Octopart=https://octopart.com/90120-0763-molex-655433, Package=90120-0763, Pitch=2.54mm, RoHS=TRUE
P1 P2: library part CMP-2000-07329-1, "Through Hole Header, Pitch 2.54 mm, 2 x 3 Position, Height 8.58 mm, Tail Length 2.54 mm, -55 to 125 degC, RoHS, Bulk", Color=Black, Manufacturer=Samtec-Inc., Package Description="Through Hole Header, Pitch 2.54 mm, 2 x 3 Position, Height 8.58 mm, Tail Length 2.54 mm", Category=Connectors,Interconnects, Connector Type=Header,Unshrouded, Contact Finish=Gold, Contact Finish Thickness=10µin(0.25µm), Contact Mating Length="0.230\"(5.84mm)", Contact Type=MalePin, Datasheet URL=http://suddendocs.samtec.com/catalog_english/tsw_th.pdf, Datasheet Version=12/2015, Family=RectangularConnectors-Headers,MalePins, Fastening Type=-, Features=-, Manufacturer URL=http://www.samtec.com/, Mounting Technology=ThroughHole, Mounting Type=ThroughHole, Number of Positions=6, Number of Positions Loaded=All, Number Of Rows=2, Package Reference=TSW-103-07-G-D, Package URL=http://suddendocs.samtec.com/prints/tsw-xxx-xx-xxx-x-xx-xxx-mkt.pdf, Packaging=Bulk, Pitch="0.100\"(2.54mm)", Row Spacing="0.100\"(2.54mm)", Series=TSW, Termination=Solder
R1_AVDD R1_DVDD R1_HVDD R1_VDD R1_VPD R1_VREF0 R1_VREF1 R1_VREF2 R2_AVDD R2_DVDD R2_HVDD R2_VDD R2_VPD R2_VREF0 R2_VREF1 R2_VREF2 R3_AVDD R3_DVDD R3_HVDD R3_VDD R3_VPD R3_VREF0 R3_VREF1 R3_VREF2 R4_AVDD R4_DVDD R4_HVDD R4_VDD R4_VPD R4_VREF0 R4_VREF1 R4_VREF2: library part CMP-2000-03820-1, Manufacturer="Vishay Dale", Part Number=CRCW0603100KFKEA
TP1 TP6 TP8 TP10_AVDD TP10_DVDD TP10_HVDD TP10_VDD TP10_VPD TP10_VREF0 TP10_VREF1 TP10_VREF2: library part CMP-2000-05181-1, "Test Point, Black, 1-Pin THD, RoHS, Bulk", Alternate Color="5004K-ND / -TESTPOINTPCMINI.040\"DYELLOW / 5003K-ND / -TESTPOINTPCMINI.040\"DORANGE / 5002K-ND / -TESTPOINTPCMINI.040\"DWHITE / 5000K-ND / -TESTPOINTPCMINI.040\"DRED", Color=Black, Manufacturer=Keystone, Standard Package=100, Catalog Drawings=5000Series, Category=TestandMeasurement, Datasheet URL=https://ciiva.com/datasheet-click-2917627?src=ciiva&sig=bd195616, Datasheet Version="Rev. G, 12/2008", Family=TestPoints, Kits="DKTGRS232C-KIT-ND / -TTLCONVERTER", Manufacturer URL=http://www.keyelco.com/, Material=Base,Nylon46,UL94V-0, Mounting Type="0.040\"(1.02mm)HoleDiameter", Online Catalog=ColorCodedTestPoints, Other Names=5001K, Packaging=Bulk, RoHS Information=RoHSComplianceStatement, Series=THM, Terminal="0.010\"x0.020\"(0.25mmx0.51mm)PhosphorBronzeWire,SilverPlated", Type=PCTestPoint,Miniature
TP2 TP3 TP4 TP5 TP7 TP9_AVDD TP9_DVDD TP9_HVDD TP9_VDD TP9_VPD TP9_VREF0 TP9_VREF1 TP9_VREF2: library part CMP-2000-05182-1, "Test Point, White, 1-Pin THD, RoHS, Bulk", Color=White, Manufacturer=KeystoneElectronics, Brand=KeystoneElectronics, Contact Material=PhosphorBronze, Datasheet URL=https://ciiva.com/datasheet-click-2917627?src=ciiva&sig=bd195616, Datasheet Version="Rev. G, 12/2008", Length=7.62mm, Manufacturer URL=http://www.keyelco.com/, Material=Nylon, Mounting Hole Size=1mm, Outside Diameter=2.54mm, Packaging=Bulk, Plating=Silver, Product=TestPoints, Product Category=CircuitBoardHardware-PCB, RoHS=True, Type=Miniature
U1_AVDD U1_DVDD U1_HVDD U1_VDD U1_VPD U1_VREF0 U1_VREF1 U1_VREF2: library part CMP-0395-00597-2, "Single Output LDO, 1 A, Adjustable 0.8 to 6 V Output, 2.2 to 6.5 V Input, with High-Bandwidth PSRR, 8-pin SON (DRB), -40 to 125 degC, Green (RoHS & no Sb/Br)", Manufacturer="Texas Instruments", Accuracy(%)=3, ComponentLink1Description="Manufacturer URL", ComponentLink1URL=http://www.ti.com/, ComponentLink2Description=Datasheet, ComponentLink2URL=http://www.ti.com/general/docs/lit/getliterature.tsp?genericPartNumber=TPS7A8001&fileType=pdf, ComponentLink3Description="Package Specification", ComponentLink3URL=http://www.ti.com/litv/pdf/mpds118h, DatasheetVersion=SBVS135G, Eco-Plan="Green (RoHS & no Sb/Br)", Iout(Max)(A)=1, Iq(Typ)(mA)=0.04, Mounting Technology="Surface Mount", PackageDescription="8-Pin Plastic Small Outline, Body 3 x 3 mm, Pitch 0.65 mm", PackageReference=DRB0008A, PackageVersion=4203482-2/K, PartNumber=TPS7A8001DRBT, SubFamily="Single Channel LDO", Vdo(Typ)(mV)=170, Vin(Max)(V)=6.5, Vin(Min)(V)=2.2, Vout Adj(Max)(V)=6, Vout Adj(Min)(V)=0.8
VR1_AVDD VR1_DVDD VR1_HVDD VR1_VDD VR1_VPD VR1_VREF0 VR1_VREF1 VR1_VREF2: library part CMP-1747-00001-1, "Square Trimpot(R) Trimming Potentiometer, 10 KOhm, +/- 10%, 0.5 W, -55 to 125 degC, 3-Pin THD, RoHS, Tube", Case\Package=0603, Case Code (Metric)=1608, Max Operating Temperature="155 degC", Min Operating Temperature="-55 degC", Package Quantity=5000, Power Rating="100 mW", Resistance="120 Ohm", Tolerance=1%, Type (Resistor)="Thick Film", Voltage Rating="75 V", Case Code (Imperial)=0603, ComponentLink1Description="Manufacturer URL", ComponentLink1URL=http://www.bourns.com/, ComponentLink2Description=Datasheet, ComponentLink2URL=http://www.bourns.com/docs/Product-Datasheets/3296.pdf, DatasheetVersion=May-16, Height="0.45 mm", Length="1.55 mm", Mount="Surface Mount", PackageDescription="3-Pin Through Hole Device, Body 9.53 x 4.83 mm, Pitch 2.54 mm", PackageReference=3296W, Packaging="Tape and Reel", Pins=2, Radiation Hardening=No, REACH SVHC=Unknown, RoHSCompliant=true, Weight="7.1E-05 oz", Width="0.85 mm"

## Free pads (board coordinates)
  round 250 hole 150: ""(150,150) ""(150,5850) ""(3650,2400) ""(3650,4600) ""(6350,2400) ""(6350,4600) ""(7850,150) ""(7850,5850)

## Via types
v1: diameter 500, hole 257, Top Layer to Bottom Layer, 6 vias

## Nets (pads, with @x,y where several pads share a name; then routed paths per layer and width w, separated by ;. In a path a pad name is that pad's centre, name@x,y a point inside that pad or via, vN(x,y) a via of type N, cw(c..) or ccw(c..) an arc to the next point about the centre after c; other vN are vias at no path point)
AVDD_1V0: C2_AVDD.1 C3_AVDD.1 J17.1 J17.3 R2_AVDD.2 TP9_AVDD.1 U1_AVDD.1 U1_AVDD.2 VR1_AVDD.1
CNOT_PHASE_HEATP_1: J8.2 X1.B9
CNOT_PHASE_HEATP_2: J8.4 X1.B8
CNOT_PHASE_HEATP_3: J8.6 X1.A10
CNOT_PHASE_HEATP_4: J8.8 X1.B7
CNOT_PHASE_HEATP_5: J8.10 X1.B6
DVDD_1V8: C2_DVDD.1 C3_DVDD.1 J5.1 J5.3 R2_DVDD.2 TP9_DVDD.1 U1_DVDD.1 U1_DVDD.2 VR1_DVDD.1
EN_AVDD: J15_AVDD.2 R1_AVDD.1 R3_AVDD.2 U1_AVDD.5
EN_DVDD: J15_DVDD.2 R1_DVDD.1 R3_DVDD.2 U1_DVDD.5
EN_HVDD: J15_HVDD.2 R1_HVDD.1 R3_HVDD.2 U1_HVDD.5
EN_VDD: J15_VDD.2 R1_VDD.1 R3_VDD.2 U1_VDD.5
EN_VPD: J15_VPD.2 R1_VPD.1 R3_VPD.2 U1_VPD.5
EN_VREF0: J15_VREF0.2 R1_VREF0.1 R3_VREF0.2 U1_VREF0.5
EN_VREF1: J15_VREF1.2 R1_VREF1.1 R3_VREF1.2 U1_VREF1.5
EN_VREF2: J15_VREF2.2 R1_VREF2.1 R3_VREF2.2 U1_VREF2.5
EOS26_DVDD_1V8: J1.16 J5.4 J14.2 X1.B2 X1.B4
eos26_ib_div: J13.4 X1.D2
eos26_ib_osc: J13.2 X1.D4
eos26_mod_n: J14.12 X1.E1
eos26_mod_n_bl: J14.10 X1.E3
EOS26_OVDD_1V0: J14.6 J17.4 X1.C1 X1.C3
eos26_reset: J3.2 X1.E16
eos26_reset_async: J3.4 X1.E14
eos26_s_clk_n: J1.6 X1.C16
eos26_s_clk_p: J1.4 X1.C14
eos26_s_enable: J1.8 X1.A16
eos26_s_in: J1.2 X1.B15
eos26_s_out: J1.14 X1.A14
eos26_s_reset: J1.12 X1.B17
eos26_s_update: J1.10 X1.D17
EOS26_VDD_1V0: J14.4 J16.4 X1.A1 X1.A3
EOS34_AVDD_1V0: J11.8 J17.2 X1.P2 X1.P4
EOS34_DVDD_1V8: J2.16 J5.2 J11.4 X1.S2 X1.S4
eos34_equip_reset: J3.6 X1.H15
eos34_hs_clk_ibias: J13.16 X1.T14
EOS34_HVDD_2V5: C2_HVDD.1 C3_HVDD.1 J11.2 R2_HVDD.2 TP9_HVDD.1 U1_HVDD.1 U1_HVDD.2 VR1_HVDD.1 X1.T1 X1.T3
eos34_ibias_rx_1: J13.14 X1.G1
eos34_ibias_rx_2: J13.12 X1.G3
eos34_IREF: J13.8 X1.F2
eos34_MOD_HEAT: J12.2 X1.J3
eos34_MOD_HV: J12.10 X1.K4
eos34_PD_BIAS_N: J12.14 X1.K2
eos34_PD_BIAS_P: J12.12 X1.L1
eos34_PS_HEAT: J12.4 X1.J1
eos34_rx_reset: J3.8 X1.J16
eos34_rx_reset_async: J3.10 X1.J14
eos34_s_clk_n: J2.6 X1.R16
eos34_s_clk_p: J2.4 X1.R14
eos34_s_enable: J2.8 P1.1 P1.3 P1.5
eos34_s_enable_equip: P1.2 X1.L16
eos34_s_enable_rx: P1.4 X1.M17
eos34_s_enable_tx: P1.6 X1.N16
eos34_s_in: J2.2 X1.P15
eos34_s_out: J2.14 P2.1 P2.3 P2.5
eos34_s_out_equip: P2.2 X1.L14
eos34_s_out_rx: P2.4 X1.M15
eos34_s_out_tx: P2.6 X1.N14
eos34_s_reset: J2.12 X1.P17
eos34_s_update: J2.10 X1.S17
eos34_TESTVD: TP2.1 X1.H4
eos34_TESTVG: TP3.1 X1.H2
eos34_TIE_HI: TP5.1 X1.K15
eos34_TIE_LO: TP4.1 X1.K17
eos34_VB_RING: J12.8 X1.L3
EOS34_VDD_1V0: J11.6 J16.2 X1.R1 X1.R3
eos34_VPD: C2_VPD.1 C3_VPD.1 J11.10 R2_VPD.2 TP9_VPD.1 U1_VPD.1 U1_VPD.2 VR1_VPD.1 X1.M4
eos34_VREF0: C2_VREF0.1 C3_VREF0.1 J11.16 R2_VREF0.2 TP9_VREF0.1 U1_VREF0.1 U1_VREF0.2 VR1_VREF0.1 X1.N1
eos34_VREF1: C2_VREF1.1 C3_VREF1.1 J11.14 R2_VREF1.2 TP9_VREF1.1 U1_VREF1.1 U1_VREF1.2 VR1_VREF1.1 X1.N3
eos34_VREF2: C2_VREF2.1 C3_VREF2.1 J11.12 R2_VREF2.2 TP9_VREF2.1 U1_VREF2.1 U1_VREF2.2 VR1_VREF2.1 X1.M2
eos34_VTERM: J12.6 X1.F4
FB_AVDD: R2_AVDD.1 R4_AVDD.2 U1_AVDD.3 VR1_AVDD.2
FB_DVDD: R2_DVDD.1 R4_DVDD.2 U1_DVDD.3 VR1_DVDD.2
FB_HVDD: R2_HVDD.1 R4_HVDD.2 U1_HVDD.3 VR1_HVDD.2
FB_VDD: R2_VDD.1 R4_VDD.2 U1_VDD.3 VR1_VDD.2
FB_VPD: R2_VPD.1 R4_VPD.2 U1_VPD.3 VR1_VPD.2
FB_VREF0: R2_VREF0.1 R4_VREF0.2 U1_VREF0.3 VR1_VREF0.2
FB_VREF1: R2_VREF1.1 R4_VREF1.2 U1_VREF1.3 VR1_VREF1.2
FB_VREF2: R2_VREF2.1 R4_VREF2.2 U1_VREF2.3 VR1_VREF2.2
GND: C1_AVDD.2 C1_DVDD.2 C1_HVDD.2 C1_VDD.2 C1_VPD.2 C1_VREF0.2 C1_VREF1.2 C1_VREF2.2 C2_AVDD.2 C2_DVDD.2 C2_HVDD.2 C2_VDD.2 C2_VPD.2 C2_VREF0.2 C2_VREF1.2 C2_VREF2.2 C3_AVDD.2 C3_DVDD.2 C3_HVDD.2 C3_VDD.2 C3_VPD.2 C3_VREF0.2 C3_VREF1.2 C3_VREF2.2 C4_AVDD.2 C4_DVDD.2 C4_HVDD.2 C4_VDD.2 C4_VPD.2 C4_VREF0.2 C4_VREF1.2 C4_VREF2.2 J1.1 J1.3 J1.5 J1.7 J1.9 J1.11 J1.13 J1.15 J2.1 J2.3 J2.5 J2.7 J2.9 J2.11 J2.13 J2.15 J3.1 J3.3 J3.5 J3.7 J3.9 J3.11 J3.12 J3.13 J3.14 J3.15 J3.16 J6.1 J7.1 J7.3 J7.5 J7.7 J7.9 J7.11 J7.12 J7.13 J7.14 J7.15 J7.16 J8.1 J8.3 J8.5 J8.7 J8.9 J8.11 J8.12 J8.13 J8.14 J8.15 J8.16 J9.1 J9.3 J9.5 J9.7 J9.9 J9.11 J9.13 J9.15 J10.1 J10.3 J10.5 J10.7 J10.9 J10.11 J10.13 J10.15 J11.1 J11.3 J11.5 J11.7 J11.9 J11.11 J11.13 J11.15 J12.1 J12.3 J12.5 J12.7 J12.9 J12.11 J12.13 J12.15 J12.16 J13.1 J13.3 J13.5 J13.6 J13.7 J13.9 J13.10 J13.11 J13.13 J13.15 J14.1 J14.3 J14.5 J14.7 J14.8 J14.9 J14.11 J14.13 J14.14 J14.15 J14.16 J15_AVDD.3 J15_DVDD.3 J15_HVDD.3 J15_VDD.3 J15_VPD.3 J15_VREF0.3 J15_VREF1.3 J15_VREF2.3 pad.@150,5850 pad.@7850,5850 R3_AVDD.1 R3_DVDD.1 R3_HVDD.1 R3_VDD.1 R3_VPD.1 R3_VREF0.1 R3_VREF1.1 R3_VREF2.1 R4_AVDD.1 R4_DVDD.1 R4_HVDD.1 R4_VDD.1 R4_VPD.1 R4_VREF0.1 R4_VREF1.1 R4_VREF2.1 TP1.1 TP6.1 TP8.1 TP10_AVDD.1 TP10_DVDD.1 TP10_HVDD.1 TP10_VDD.1 TP10_VPD.1 TP10_VREF0.1 TP10_VREF1.1 TP10_VREF2.1 U1_AVDD.4 U1_AVDD.9 U1_DVDD.4 U1_DVDD.9 U1_HVDD.4 U1_HVDD.9 U1_VDD.4 U1_VDD.9 U1_VPD.4 U1_VPD.9 U1_VREF0.4 U1_VREF0.9 U1_VREF1.4 U1_VREF1.9 U1_VREF2.4 U1_VREF2.9 VR1_AVDD.3 VR1_DVDD.3 VR1_HVDD.3 VR1_VDD.3 VR1_VPD.3 VR1_VREF0.3 VR1_VREF1.3 VR1_VREF2.3 X1.A2 X1.A4 X1.A5 X1.A11 X1.A13 X1.A15 X1.A17 X1.B1 X1.B3 X1.B5 X1.B13 X1.B14 X1.B16 X1.C2 X1.C4 X1.C5 X1.C10 X1.C13 X1.C15 X1.C17 X1.D1 X1.D3 X1.D5 X1.D13 X1.D14 X1.D15 X1.D16 X1.E2 X1.E4 X1.E15 X1.E17 X1.F1 X1.F3 X1.F14 X1.F15 X1.F16 X1.F17 X1.G2 X1.G4 X1.G14 X1.G15 X1.G16 X1.G17 X1.H1 X1.H3 X1.H14 X1.H16 X1.H17 X1.J2 X1.J4 X1.J15 X1.J17 X1.K1 X1.K3 X1.K14 X1.K16 X1.L2 X1.L4 X1.L15 X1.L17 X1.M1 X1.M3 X1.M14 X1.M16 X1.N2 X1.N4 X1.N15 X1.N17 X1.P1 X1.P3 X1.P14 X1.P16 X1.R2 X1.R4 X1.R15 X1.R17 X1.S1 X1.S3 X1.S14 X1.S15 X1.S16 X1.T2 X1.T4 X1.T15 X1.T16 X1.T17
ICR_RING_HEATP_1: J9.10 X1.D12 | length 2407.5
  Top Layer w25: X1.D12 5348.5,2656.5 5348.5,2186.5 5650,1885 J9.10
ICR_RING_HEATP_2: J9.12 X1.D11 | length 2705.8
  Top Layer w25: X1.D11 5255,2760 5435,2760 5450,2745 5450,2180 5750,1880 J9.12
ICR_RING_HEATP_3: J9.14 X1.C7
ICR_RING_HEATP_4: J9.16 X1.C6
NR_AVDD: C4_AVDD.1 U1_AVDD.6
NR_DVDD: C4_DVDD.1 U1_DVDD.6
NR_HVDD: C4_HVDD.1 U1_HVDD.6
NR_VDD: C4_VDD.1 U1_VDD.6
NR_VPD: C4_VPD.1 U1_VPD.6
NR_VREF0: C4_VREF0.1 U1_VREF0.6
NR_VREF1: C4_VREF1.1 U1_VREF1.6
NR_VREF2: C4_VREF2.1 U1_VREF2.6
PES_PHASE_HEATP_1: J9.2 X1.A9 | length 2066.1
  Top Layer w25: X1.A9 5000,1625 5250,1375 J9.2
PES_PHASE_HEATP_2: J9.4 X1.A8 | length 2294.5
  Top Layer w25: X1.A8 4948.5,2453.5 5031.5,2453.5 5048.5,2436.5 5048.5,1651.5 5300,1400 5300,492.5 J9.4
PES_PHASE_HEATP_3: J9.6 X1.A7 | length 2441
  Top Layer w25: X1.A7 4800,2375 4950,2225 4950,1600 5200,1350 5200,405 5211.83,393.17 5400.67,393.17 J9.6
PES_PHASE_HEATP_4: J9.8 X1.A6 | length 2823.1
  Top Layer w25: X1.A6 4900,2205 4900,1575 5150,1325 5150,325 5215,260 5460,260 5500,300 5500,392.5 J9.8
SFH_FILT_HEATP_1: J7.4 X1.B11 | length 2816.7
  Bottom Layer w25: X1.B11 5150,2455 5150,1650 6406.83,393.17 6500.67,393.17 J7.4
SFH_FILT_HEATP_2: J7.6 X1.C11 | length 2825.1
  Bottom Layer w25: X1.C11 5248.5,2556.5 5317.09,2556.5 5348.88,2524.71 5348.88,2487.54 5380.85,2455.56 5418.03,2455.56 5450,2423.59 5450,1875 6650,675 J7.6
SFH_FILT_HEATP_3: J7.8 X1.C12 | length 2861.9
  Bottom Layer w25: X1.C12 5306.7,2598.3 5338.11,2598.3 5379.91,2556.5 5517.09,2556.5 5550,2523.59 5550,1875 6750,675 J7.8
SFH_FILT_HEATP_4: J7.10 X1.B12
SFH_SOURCE_HEATP: J7.2 X1.A12 | length 2438.8
  Bottom Layer w25: X1.A12 5300,1592.5 J7.2
SWICR_PHASE_HEATP_1: J10.8 X1.D10
SWICR_PHASE_HEATP_2: J10.10 X1.C8
SWICR_PHASE_HEATP_3: J10.12 X1.D7
SWICR_RING_HEATP_1: J10.2 X1.B10
SWICR_RING_HEATP_2: J10.4 X1.C9
SWICR_RING_HEATP_3: J10.6 X1.D6
SWPS_PHASE_HEATP_1: J10.14 X1.D9
SWPS_PHASE_HEATP_2: J10.16 X1.D8
V_IN_BANANA: C1_AVDD.1 C1_DVDD.1 C1_HVDD.1 C1_VDD.1 C1_VPD.1 C1_VREF0.1 C1_VREF1.1 C1_VREF2.1 J4.1 J15_AVDD.1 J15_DVDD.1 J15_HVDD.1 J15_VDD.1 J15_VPD.1 J15_VREF0.1 J15_VREF1.1 J15_VREF2.1 R1_AVDD.2 R1_DVDD.2 R1_HVDD.2 R1_VDD.2 R1_VPD.2 R1_VREF0.2 R1_VREF1.2 R1_VREF2.2 TP7.1 U1_AVDD.7 U1_AVDD.8 U1_DVDD.7 U1_DVDD.8 U1_HVDD.7 U1_HVDD.8 U1_VDD.7 U1_VDD.8 U1_VPD.7 U1_VPD.8 U1_VREF0.7 U1_VREF0.8 U1_VREF1.7 U1_VREF1.8 U1_VREF2.7 U1_VREF2.8
V_OUT_VDD: C2_VDD.1 C3_VDD.1 J16.1 J16.3 R2_VDD.2 TP9_VDD.1 U1_VDD.1 U1_VDD.2 VR1_VDD.1
copper on no net:
  other v1: 3500,1500 6500,1500 3500,5500 4500,5500 5500,5500 6500,5500

## Polygon pours and split planes (outlines as drawn)
GND on MidLayer 1 "GND_L02_P000" (solid, pour order 0): 0,0 8000,0 8000,6000 0,6000
V_IN_BANANA on Top Layer "V_IN_BANANA_L01_P002" (solid, pour order 2): 700,0 700,5500 2050,5500 2050,0

## Silkscreen, mask and mechanical layers (free items; w line width, h text height)
Top Overlay:
  lines w10: 3500,2400 ccw(c3650,2400) 3650,2250 6350,2250 ccw(c6350,2400) 6500,2400 6500,4600 ccw(c6350,4600) 6350,4750 3650,4750 ccw(c3650,4600) 3500,4600 3500,2400
  text "NSF EQuIP" at 900,5650 h250
  text "EOS26_RX_RESET_ASYNC" at 6694.54,4875 h50
  text "EOS34_DVDD" at 2580,4815 h50
  text "EOS26_RX_RESET" at 6872.73,4775 h50
  text "EOS26_DVDD" at 2580,4715 h50
  text "EOS34 Power" at 200,4700 h100 r90
  text "EOS26_EQUIP_RESET" at 6795.66,4675 h50
  text "EOS26_RESET_ASYNC" at 6781.57,4575 h50
  text "Chip Resets" at 7900,4550 h100 r90
  text "EOS26_RESET" at 6959.76,4475 h50
  text "EOS34_VDD" at 2580,4315 h50
  text "EOS26_VDD" at 2580,4215 h50
  text "EOS26_DVDD_1V8" at 6878.7,3975 h50
  text "EOS26_S_OUT" at 6959.76,3875 h50
  text "EOS34_AVDD" at 2585,3815 h50
  text "EOS26_S_RESET" at 6905.03,3775 h50
  text "EOS26_OVDD" at 2585,3715 h50
  text "EOS26_S_UPDATE" at 6874.19,3675 h50
  text "EOS34 Bias" at 200,3600 h100 r90
  text "EOS26_S_ENABLE" at 6879.08,3575 h50
  text "EOS26_S_CLK_N" at 6912.7,3475 h50
  text "EOS26 Scan Chain" at 7900,3400 h100 r90
  text "EOS26_S_CLK_P" at 6913.43,3375 h50
  text "EOS26_S_IN" at 7012.19,3275 h50
  text "EOS34_DVDD_1V8" at 6878.7,2775 h50
  text "EOS34_S_OUT" at 6959.76,2675 h50
  text "EOS34_S_RESET" at 6905.03,2575 h50
  text "EOS34_S_UPDATE" at 6874.19,2475 h50
  text "Current References" at 200,2400 h100 r90
  text "EOS34_S_ENABLE" at 6879.08,2375 h50
  text "EOS34_S_CLK_N" at 6912.7,2275 h50
  text "EOS34_S_CLK_P" at 6913.43,2175 h50
  text "EOS34 Scan Chain" at 7900,2100 h100 r90
  text "EOS34_S_IN" at 7012.19,2075 h50
  text "Test FET" at 4675,1400 h100
  text "EOS34_TESTVG" at 7625,1350 h50 r90
  text "EOS34_TESTVD" at 7875,1350 h50 r90
  text "GND" at 7500,1300 h50 r270
  text "EOS34_TIE_HI" at 7700,1300 h50 r270
  text "EOS34_TIE_LO" at 7900,1300 h50 r270
  text "EOS26 Power" at 200,1100 h100 r90
  text "SWICR_RING_1" at 2850,650 h50 r90
  text "SWICR_RING_2" at 2950,650 h50 r90
  text "SWICR_RING_3" at 3050,650 h50 r90
  text "SWICR_PHASE_1" at 3150,650 h50 r90
  text "SWICR_PHASE_2" at 3250,650 h50 r90
  text "SWICR_PHASE_3" at 3350,650 h50 r90
  text "SWPS_PHASE_1" at 3450,650 h50 r90
  text "SWPS_PHASE_2" at 3550,650 h50 r90
  text "CNOT_PHASE_1" at 4050,650 h50 r90
  text "CNOT_PHASE_2" at 4150,650 h50 r90
  text "CNOT_PHASE_3" at 4250,650 h50 r90
  text "CNOT_PHASE_4" at 4350,650 h50 r90
  text "CNOT_PHASE_5" at 4450,650 h50 r90
  text "PES_PHASE_1" at 5250,650 h50 r90
  text "PES_PHASE_2" at 5350,650 h50 r90
  text "PES_PHASE_3" at 5450,650 h50 r90
  text "PES_PHASE_4" at 5550,650 h50 r90
  text "ICR_RING_1" at 5650,650 h50 r90
  text "ICR_RING_2" at 5750,650 h50 r90
  text "ICR_RING_3" at 5850,650 h50 r90
  text "ICR_RING_4" at 5950,650 h50 r90
  text "SFH_SOURCE" at 6450,650 h50 r90
  text "SFH_FILT_1" at 6550,650 h50 r90
  text "SFH_FILT_2" at 6650,650 h50 r90
  text "SFH_FILT_3" at 6750,650 h50 r90
  text "SFH_FILT_4" at 6850,650 h50 r90
  text "GND" at 7800,600 h50 r90
  text "GND" at 1250,100 h50
  text "VIN" at 2000,100 h50
  text "EOS26 Quantum Photonics Heaters" at 4275,75 h100

## Dimensions
5800,4005 to 6500,4600 on Bottom Overlay
4200,4005 to 3500,4600 on Bottom Overlay
3650,2250 to 3650,4750 on Top Component Center
3500,2400 to 6500,4600 on Top Component Center

## Text inside footprints (layer, text, board x,y; h text height)
X1: Bottom Overlay "17" at 5811.25,4052.19 h31.25; Bottom Overlay "14" at 5511.25,4054.53 h31.25; Bottom Overlay "15" at 5611.25,4054.53 h31.25; Bottom Overlay "2" at 4311.25,4055.31 h31.25; Bottom Overlay "3" at 4411.25,4054.53 h31.25; Bottom Overlay "16" at 5711.25,4054.53 h31.25; Bottom Overlay "4" at 4511.25,4054.53 h31.25; Bottom Overlay "1" at 4211.25,4055.31 h31.25; Bottom Overlay "A" at 5911.25,2394.38 h31.25; Bottom Overlay "D" at 5911.25,2694.38 h31.25; Bottom Overlay "C" at 5911.25,2594.38 h31.25; Bottom Overlay "G" at 5911.25,2994.38 h31.25; Bottom Overlay "F" at 5911.25,2894.38 h31.25; Bottom Overlay "K" at 5911.25,3278.75 h31.25; Bottom Overlay "J" at 5911.25,3178.75 h31.25; Bottom Overlay "N" at 5911.25,3578.75 h31.25; Bottom Overlay "M" at 5911.25,3478.75 h31.25; Bottom Overlay "S" at 5911.25,3878.75 h31.25; Bottom Overlay "R" at 5911.25,3778.75 h31.25; Bottom Overlay "L" at 5911.25,3378.75 h31.25; Bottom Overlay "H" at 5911.25,3094.38 h31.25; Bottom Overlay "E" at 5911.25,2794.38 h31.25; Bottom Overlay "B" at 5911.25,2494.38 h31.25; Bottom Overlay "T" at 5911.25,3978.75 h31.25; Bottom Overlay "P" at 5911.25,3678.75 h31.25; Bottom Overlay "P" at 4136.25,3678.75 h31.25; Bottom Overlay "T" at 4136.25,3978.75 h31.25; Bottom Overlay "B" at 4136.25,2494.38 h31.25; Bottom Overlay "E" at 4136.25,2794.38 h31.25; Bottom Overlay "H" at 4136.25,3094.38 h31.25; Bottom Overlay "L" at 4136.25,3378.75 h31.25; Bottom Overlay "1" at 4211.25,2330.31 h31.25; Bottom Overlay "7" at 4811.25,2326.41 h31.25; Bottom Overlay "4" at 4511.25,2329.53 h31.25; Bottom Overlay "16" at 5711.25,2329.53 h31.25; Bottom Overlay "13" at 5411.25,2327.97 h31.25; Bottom Overlay "10" at 5114.38,2330.31 h31.25; Bottom Overlay "R" at 4136.25,3778.75 h31.25; Bottom Overlay "S" at 4136.25,3878.75 h31.25; Bottom Overlay "M" at 4136.25,3478.75 h31.25; Bottom Overlay "N" at 4136.25,3578.75 h31.25; Bottom Overlay "J" at 4136.25,3178.75 h31.25; Bottom Overlay "K" at 4136.25,3278.75 h31.25; Bottom Overlay "F" at 4136.25,2894.38 h31.25; Bottom Overlay "G" at 4136.25,2994.38 h31.25; Bottom Overlay "C" at 4136.25,2594.38 h31.25; Bottom Overlay "D" at 4136.25,2694.38 h31.25; Bottom Overlay "A" at 4136.25,2394.38 h31.25; Bottom Overlay "3" at 4411.25,2329.53 h31.25; Bottom Overlay "2" at 4311.25,2330.31 h31.25; Bottom Overlay "6" at 4711.25,2331.88 h31.25; Bottom Overlay "5" at 4611.25,2330.31 h31.25; Bottom Overlay "9" at 5011.25,2325.62 h31.25; Bottom Overlay "8" at 4911.25,2329.53 h31.25; Bottom Overlay "12" at 5311.25,2327.19 h31.25; Bottom Overlay "11" at 5211.25,2329.53 h31.25; Bottom Overlay "15" at 5611.25,2329.53 h31.25; Bottom Overlay "14" at 5511.25,2329.53 h31.25; Bottom Overlay "17" at 5811.25,2327.19 h31.25; Top Overlay "17" at 5786.25,4052.19 h31.25; Top Overlay "14" at 5486.25,4054.53 h31.25; Top Overlay "16" at 5686.25,4054.53 h31.25; Top Overlay "15" at 5586.25,4054.53 h31.25; Top Overlay "4" at 4486.25,4054.53 h31.25; Top Overlay "3" at 4386.25,4054.53 h31.25; Top Overlay "2" at 4286.25,4055.31 h31.25; Top Overlay "1" at 4186.25,4055.31 h31.25; Top Overlay "B" at 4111.25,2494.38 h31.25; Top Overlay "C" at 4111.25,2594.38 h31.25; Top Overlay "F" at 4111.25,2894.38 h31.25; Top Overlay "G" at 4111.25,2994.38 h31.25; Top Overlay "L" at 4111.25,3378.75 h31.25; Top Overlay "M" at 4111.25,3478.75 h31.25; Top Overlay "R" at 4111.25,3778.75 h31.25; Top Overlay "S" at 4111.25,3878.75 h31.25; Top Overlay "A" at 4111.25,2394.38 h31.25; Top Overlay "E" at 4111.25,2794.38 h31.25; Top Overlay "D" at 4111.25,2694.38 h31.25; Top Overlay "H" at 4111.25,3094.38 h31.25; Top Overlay "J" at 4111.25,3178.75 h31.25; Top Overlay "K" at 4111.25,3278.75 h31.25; Top Overlay "P" at 4111.25,3678.75 h31.25; Top Overlay "N" at 4111.25,3578.75 h31.25; Top Overlay "T" at 4111.25,3978.75 h31.25; Top Overlay "1" at 4186.25,2330.31 h31.25; Top Overlay "2" at 4286.25,2330.31 h31.25; Top Overlay "3" at 4386.25,2329.53 h31.25; Top Overlay "4" at 4486.25,2329.53 h31.25; Top Overlay "6" at 4686.25,2331.88 h31.25; Top Overlay "7" at 4786.25,2326.41 h31.25; Top Overlay "8" at 4886.25,2329.53 h31.25; Top Overlay "11" at 5186.25,2329.53 h31.25; Top Overlay "12" at 5286.25,2327.19 h31.25; Top Overlay "15" at 5586.25,2329.53 h31.25; Top Overlay "16" at 5686.25,2329.53 h31.25; Top Overlay "5" at 4586.25,2330.31 h31.25; Top Overlay "10" at 5089.38,2330.31 h31.25; Top Overlay "9" at 4986.25,2325.62 h31.25; Top Overlay "13" at 5386.25,2327.97 h31.25; Top Overlay "14" at 5486.25,2329.53 h31.25; Top Overlay "17" at 5786.25,2327.19 h31.25; Top Overlay "T" at 5886.25,3978.75 h31.25; Top Overlay "N" at 5886.25,3578.75 h31.25; Top Overlay "P" at 5886.25,3678.75 h31.25; Top Overlay "K" at 5886.25,3278.75 h31.25; Top Overlay "J" at 5886.25,3178.75 h31.25; Top Overlay "H" at 5886.25,3094.38 h31.25; Top Overlay "D" at 5886.25,2694.38 h31.25; Top Overlay "E" at 5886.25,2794.38 h31.25; Top Overlay "A" at 5886.25,2394.38 h31.25; Top Overlay "S" at 5886.25,3878.75 h31.25; Top Overlay "R" at 5886.25,3778.75 h31.25; Top Overlay "M" at 5886.25,3478.75 h31.25; Top Overlay "L" at 5886.25,3378.75 h31.25; Top Overlay "G" at 5886.25,2994.38 h31.25; Top Overlay "F" at 5886.25,2894.38 h31.25; Top Overlay "C" at 5886.25,2594.38 h31.25; Top Overlay "B" at 5886.25,2494.38 h31.25